# Altium PCB ZYNQ_Motherboard_final.PcbDoc (part 2 of 2)
Units mm, origin at the board's own origin, x right, y up, seen from the top; angles counter-clockwise.
Board outline 100.01 x 120 mm, 4 copper layers (Top Layer, GND, Signal03, Bottom Layer), stack 0.778 mm thick; 115 components, 152 nets, 669 pads, 267 vias.
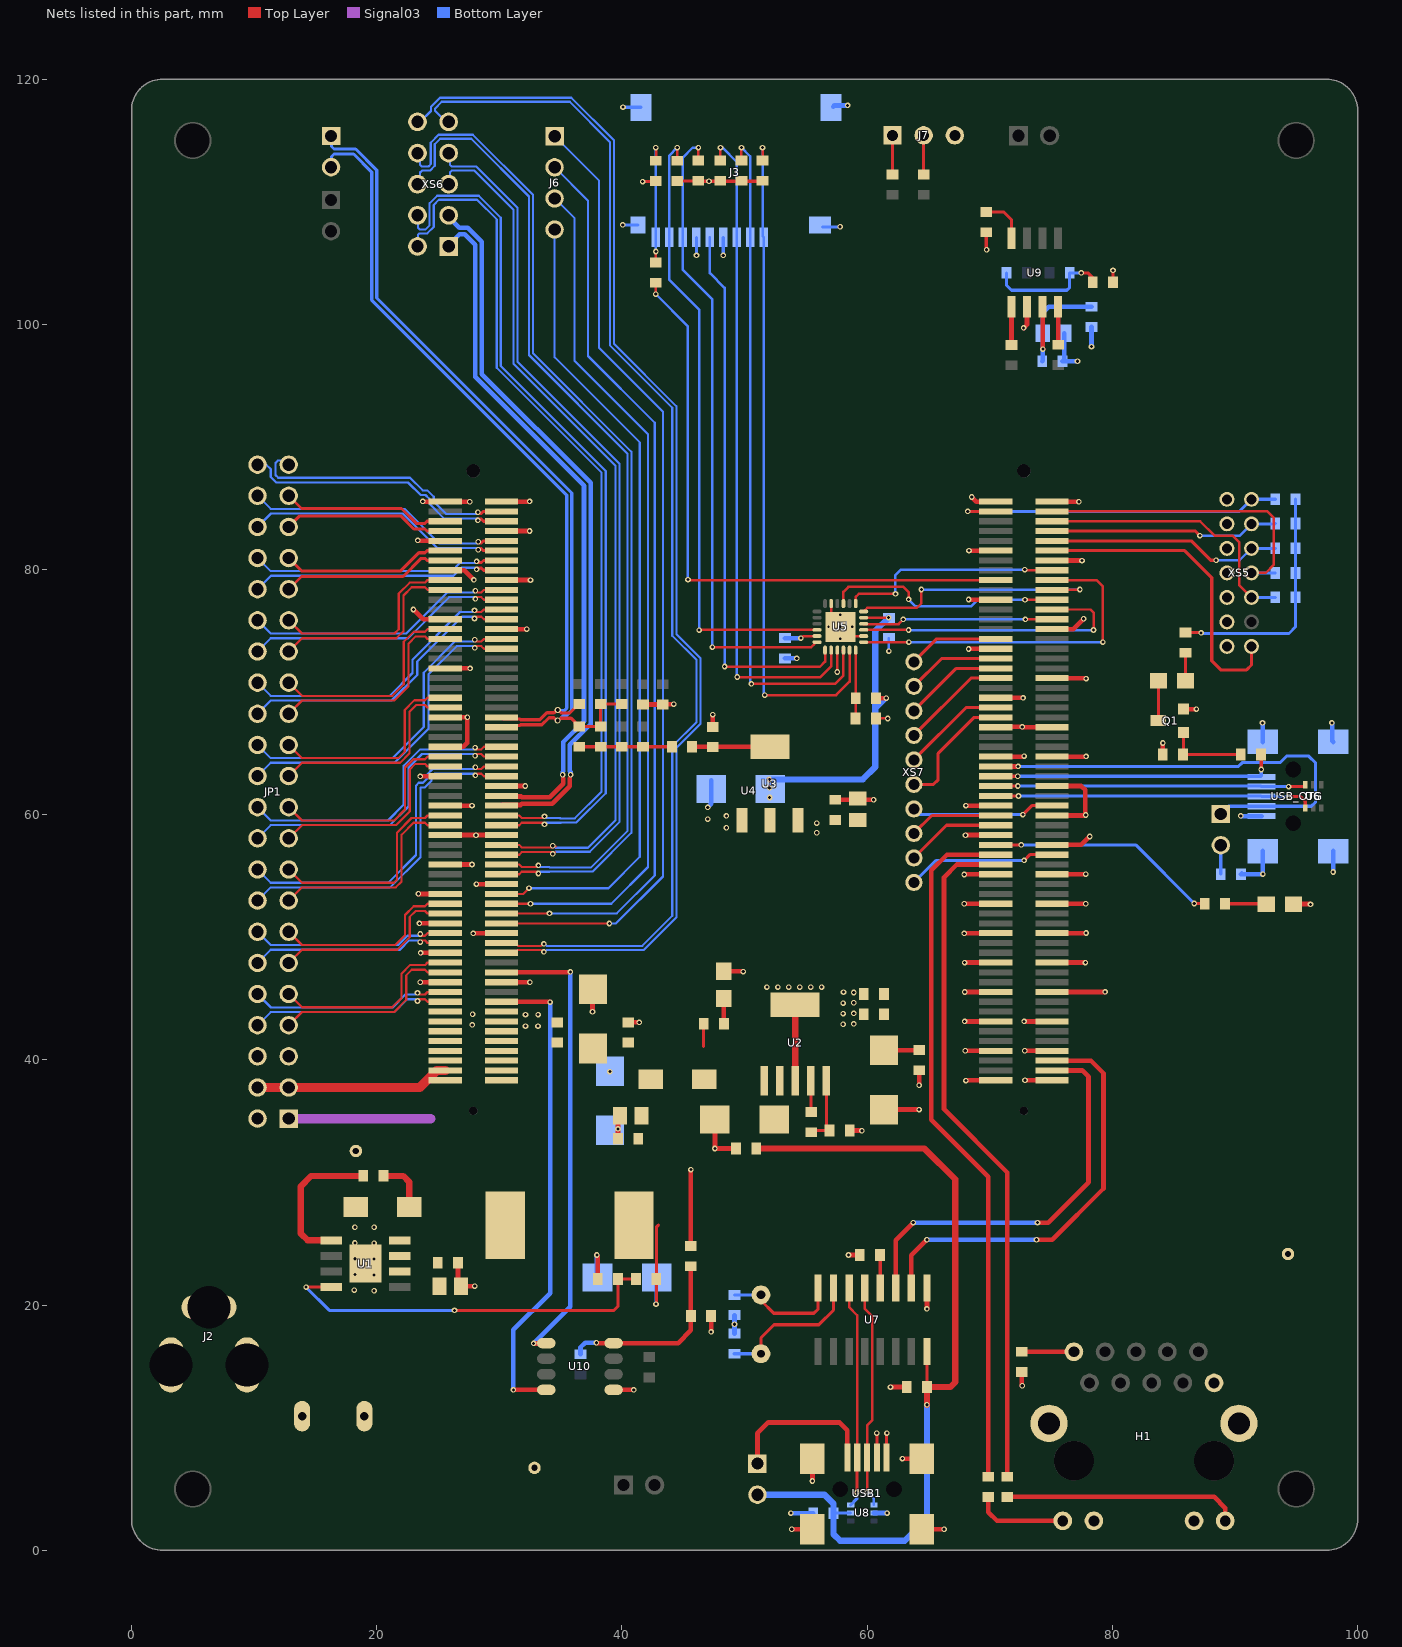
[diagram p4: the nets of this part, all layers, seen from the top]

## Via types
v1: diameter 0.457, hole 0.254, Top Layer to Bottom Layer, tented both sides, 260 vias
v2: diameter 0.4, hole 0.2, Top Layer to Bottom Layer, tented top, 4 vias
v3: diameter 0.5, hole 0.3, Top Layer to Bottom Layer, tented both sides, 2 vias
v4: diameter 0.4, hole 0.2, Top Layer to Bottom Layer, 1 vias

## Nets (pads, with @x,y where several pads share a name; then routed paths per layer and width w, separated by ;. In a path a pad name is that pad's centre, name@x,y a point inside that pad or via, vN(x,y) a via of type N, cw(c..) or ccw(c..) an arc to the next point about the centre after c; other vN are vias at no path point) (continued)
GND: C2.2 C3.2 C4.2 C5.2 C6.2 C7.1 C8.1 C9.2 C10.2 C11.1 C12.1 C13.2 C14.2 C15.2 C16.2 C17.2 C18.2 C19.1 C20.1 C25.1 C26.2 C27.2 C28.1 C29.1 C30.1 C31.2 C32.2 C33.2 C34.2 D2.1 DS1.2 DS3.2 H1.10 H1.12 H1.13 H1.15 H1.16 J2.2 J2.3 J3.6 J3.10 J3.11 J3.12 J3.13 J7.3 JP1.2 JP1.5 JP1.6 L3.1 L5.1 pad.2 Q1.2 R2.2 R5.1 R6.2 R8.1 R15.1 R30.1 R34.2 U1.6 U1.9 U2.3 U2.6 U3.1 U4.A11 U4.A12 U4.A13 U4.A14 U4.A15 U4.A16 U4.A21 U4.A22 U4.A27 U4.A32 U4.A33 U4.A39 U4.A42 U4.A45 U4.A51 U4.A52 U4.A57 U4.A62 U4.A63 U4.A69 U4.A75 U4.A85 U4.A94 U4.A95 U4.A104 U4.A105 U4.A111 U4.A114 U4.A119 U4.A120 U4.B1 U4.B2 U4.B7 U4.B8 U4.B13 U4.B14 U4.B19 U4.B20 U4.B25 U4.B26 U4.B31 U4.B32 U4.B37 U4.B38 U4.B43 U4.B44 U4.B50 U4.B51 U4.B56 U4.B57 U4.B62 U4.B67 U4.B68 U4.B73 U4.B74 U4.B79 U4.B84 U4.B89 U4.B94 U4.B99 U4.B108 U4.B109 U4.B119 U4.B120 U5.2 U5.11 U5.25 U7.1 U8.2 U9.2 U10.5 USB1.4 USB1.5 USB1.6 USB1.7 USB1.8 USB1.9 USB_OTG.5 USB_OTG.6 USB_OTG.7 USB_OTG.8 USB_OTG.9 XS5.1 XS5.3 XS5.5 XS5.7 XS5.9 XS5.11 XS5.13 | length 244.4
  Top Layer w0.203: U5.11@57.074,77.226 57.074,76.076 v2(57.824,75.326) 58.574,74.576 U5.2@59.724,74.576 ; R8.1@60.72,67.854 v1(61.685,67.854)
  Top Layer w0.254: v1(41.695,111.643) 42.838,111.643 R15.1@42.788,111.694 ; v1(60.796,9.565) 60.799,9.562 USB1.4@60.799,7.567 ; USB1.5@61.599,7.567 61.599,9.58 v1(61.614,9.565) ; R30.1@69.723,107.505 69.723,106.107 v1(69.749,106.082) ; C34.2@80.06,103.44 80.06,104.404 v1(80.061,104.405)
  Top Layer w0.381: v1(23.001,76.744) 23.804,75.941 U4.A95@25.592,75.941 ; v1(23.357,82.383) 23.398,82.341 U4.A111@25.592,82.341 ; v1(23.407,53.554) 23.42,53.541 U4.A39@25.592,53.541 ; v1(23.484,51.141) U4.A33@25.592,51.141 ; v1(23.56,63.13) 23.571,63.141 U4.A63@25.592,63.141 ; v1(23.56,46.34) U4.A21@25.592,46.341 ; v1(23.585,48.728) 23.598,48.741 U4.A27@25.592,48.741 ; v1(23.763,85.558) 23.78,85.541 U4.A119@25.592,85.541 27.59,85.541 v1(27.598,85.532) ; U4.A45@25.592,55.941 v1(27.776,55.941) ; U4.A51@25.592,58.341 28.094,58.341 v1(28.106,58.329) 28.118,58.341 U4.A52@30.192,58.341 ; U4.A57@25.592,60.741 v1(27.776,60.742) v1(27.776,60.742) ; U4.A69@25.592,65.541 27.063,65.541 27.381,65.858 27.381,67.941 U4.A75@25.592,67.941 ; U4.A85@25.592,71.941 27.621,71.941 v1(27.624,71.943) ; U4.A105@25.592,79.941 27.145,79.941 v1(27.929,79.157) ; C3.2@26.629,23.455 26.629,21.797 C2.2@26.883,21.544 v1@27.996,21.544 ; v1(27.878,50.328) 27.891,50.341 U4.A32@30.192,50.341 ; v1(28.132,54.341) U4.A42@30.192,54.341 ; U4.A22@30.192,46.341 v1(32.501,46.34) ; U4.A62@30.192,62.341 v1(32.12,62.342) v1(32.12,62.342) ; U4.A94@30.192,75.141 32.244,75.141 v1(32.247,75.144) ; U4.A104@30.192,79.141 32.542,79.141 v1(32.551,79.132) ; U4.A114@30.192,83.141 32.471,83.141 v1(32.475,83.145) ; U4.A120@30.192,85.541 32.458,85.541 v1(32.475,85.558) ; v1(37.606,43.927) 37.606,46.239 C15.2@37.657,46.289 ; v1(37.962,24.09) 37.911,24.09 38.038,23.963 R2.2@38.038,22.134 ; U10.5@39.335,13.092 v1(40.972,13.092) ; C14.2@39.69,33.564 v1(39.69,34.377) 39.69,35.278 C10.2@39.855,35.444 ; C18.2@40.527,43.064 v1(41.416,43.064) ; L5.1@41.721,68.997 L3.1@43.346,68.998 ; L3.1@43.346,68.998 43.36,69.012 44.223,69.012 v1(44.236,69.025) ; C33.2@47.282,19.111 v1(47.283,17.816) v1(47.283,17.816) ; v1(47.418,68.168) 47.423,68.163 47.423,67.169 C12.1@47.428,67.165 ; C6.2@47.594,35.153 47.594,32.783 v1(47.588,32.777) C5.2@49.315,32.777 ; DS1.2@48.299,47.229 49.874,47.229 v1(49.9,47.204) ; v1(53.862,1.716) 53.865,1.713 USB1.9@55.549,1.713 ; v1(55.538,5.653) 55.549,5.664 USB1.8@55.549,7.467 ; C7.1@57.418,61.226 v1(60.542,61.226) ; v1(58.485,24.087) C25.1@59.4,24.087 ; R34.2@58.586,34.25 59.552,34.25 v1(59.577,34.224) ; C4.2@61.38,35.952 v1(64.251,35.952) ; v1(61.914,13.317) C26.2@63.235,13.317 ; v1(62.879,7.482) 62.894,7.467 USB1.6@64.449,7.467 ; v1(64.251,37.933) C11.1@64.251,39.153 ; USB1.7@64.449,1.713 66.28,1.713 v1(66.283,1.716) ; v1(64.886,19.693) U7.1@64.886,21.404 ; v1(67.934,50.328) 67.947,50.341 U4.B31@70.499,50.341 ; v1(67.934,52.741) U4.B37@70.499,52.741 ; v1(67.934,55.129) 67.946,55.141 U4.B43@70.499,55.141 ; v1(67.959,43.14) v1(67.959,43.14) U4.B13@70.499,43.141 ; v1(67.959,47.94) U4.B25@70.499,47.941 ; v1(67.971,45.541) U4.B19@70.499,45.541 ; v1(68.01,40.752) 68.021,40.741 U4.B7@70.499,40.741 ; v1(68.035,58.329) 68.047,58.341 U4.B51@70.499,58.341 ; v1(68.061,38.314) 68.088,38.341 U4.B1@70.499,38.341 ; v1(68.061,60.742) v1(68.061,60.742) U4.B57@70.499,60.741 ; v1(68.289,73.518) 68.312,73.541 U4.B89@70.499,73.541 ; v1(68.289,77.557) 68.305,77.541 U4.B99@70.499,77.541 ; v1(68.315,81.545) 68.318,81.541 U4.B109@70.499,81.541 ; v1(68.543,85.913) 68.916,85.541 U4.B119@70.499,85.541 ; U4.B67@70.499,64.741 72.771,64.741 v1(72.81,64.781) ; U4.B73@70.499,67.141 70.526,67.168 v1(72.658,67.168) 72.685,67.141 U4.B74@75.099,67.141 ; U4.B79@70.499,69.541 72.724,69.541 v1(72.734,69.53) ; C27.2@72.633,14.544 72.633,13.451 v1(72.658,13.426) ; v1(72.771,99.706) 73.051,99.986 U9.2@73.051,101.434 ; v1(72.81,43.14) v1(72.81,43.14) U4.B14@75.099,43.141 ; v1(72.861,40.752) 72.872,40.741 U4.B8@75.099,40.741 ; v1(72.887,38.339) 72.888,38.341 U4.B2@75.099,38.341 ; U4.B20@75.099,45.541 79.403,45.541 v1(79.414,45.553) ; U4.B26@75.099,47.941 v1(77.814,47.94) ; U4.B32@75.099,50.341 77.853,50.341 v1(77.865,50.353) ; U4.B38@75.099,52.741 v1(77.84,52.741) ; U4.B44@75.099,55.141 77.827,55.141 v1(77.84,55.154) ; U4.B50@75.099,57.541 77.483,57.541 v1(78.17,58.227) ; U4.B56@75.099,59.941 77.801,59.941 77.801,62.026 77.485,62.341 U4.B62@75.099,62.341 ; U4.B68@75.099,64.741 77.851,64.741 v1(77.865,64.755) ; U4.B84@75.099,71.141 77.829,71.141 v1(77.865,71.105) ; U4.B94@75.099,75.141 76.821,75.141 v1(77.662,75.982) ; U4.B108@75.099,80.741 77.526,80.741 v1(77.535,80.732) ; U4.B120@75.099,85.541 77.272,85.541 v1(77.281,85.532) ; R6.2@84.127,64.908 84.127,65.823 84.126,65.824 v1(84.126,65.847) ; Q1.2@85.802,68.616 v1(86.869,68.616) ; DS3.2@94.779,52.714 96.151,52.714 v1(96.175,52.69)
  Top Layer w0.508: U2.3@54.141,38.314 U2.6@54.141,44.514
  Bottom Layer w0.203: v1(61.787,73.34) C19.1@61.787,74.408
  Bottom Layer w0.254: v1(40.07,108.113) 40.078,108.105 J3.10@41.32,108.105 ; v1(40.095,117.714) 40.104,117.705 J3.11@41.574,117.705 ; J3.6@46.074,107.097 46.074,105.639 v1(46.09,105.624) ; J3.12@56.388,107.95 v1@57.802,107.95 ; v1@69.741,106.09 v1(69.749,106.082)
  Bottom Layer w0.381: v1(37.962,24.09) 37.962,22.185 C13.2@38.012,22.236 ; v1(47.004,60.606) 47.283,60.885 C9.2@47.283,62.815 ; C28.1@49.188,17.686 v1(49.188,18.436) C29.1@49.188,19.186 ; C20.1@53.303,72.756 v1(54.268,72.756) ; v1(53.786,3.037) C30.1@55.615,3.037 ; J3.13@57.24,117.756 57.341,117.856 v1(58.42,117.856) ; U8.2@60.563,3.047 61.624,3.047 v1(61.634,3.037) ; C31.2@76.085,99.275 76.085,97.128 C32.2@75.945,96.989 v1(77.165,96.989) ; v1(90.478,59.904) 90.494,59.888 USB_OTG.5@92.171,59.888 ; R5.1@90.554,55.205 R5.1@90.503,55.154 v1(92.282,55.154) 92.271,55.165 USB_OTG.6@92.271,57.038 ; v1(92.256,67.498) 92.271,67.484 USB_OTG.8@92.271,65.938 ; v1(97.921,67.498) 97.946,67.473 97.946,66.017 USB_OTG.9@98.025,65.938 ; v1@98.025,55.335 USB_OTG.7@98.025,57.038
  other v1: 19.798,21.169 18.172,21.22 28.002,21.55 19.798,22.464 18.223,22.502 19.798,23.76 18.248,23.785 19.798,25.055 18.223,25.068 18.223,26.35 19.798,26.35 32.145,42.759 33.161,42.759 27.802,42.86 32.145,43.699 33.174,43.699 27.827,43.724 51.83,45.934 52.724,45.934 53.618,45.934 54.512,45.934 55.406,45.934 56.3,45.934 98.022,55.332 48.528,58.94 47.004,59.64 48.528,59.906 77.84,59.98 27.395,67.956 57.81,107.958
  other v2: 57.824,74.356 56.854,75.326 58.794,75.326
  other v4: 57.824,76.296
I2C0_CMD_1V8: U4.B96 U5.4 | length 15.6
  Top Layer w0.203: U5.4@59.724,75.576 59.751,75.55 62.569,75.55 v1(62.955,75.936) ; v1(72.912,75.931) 75.089,75.931 U4.B96@75.099,75.941
  Bottom Layer w0.203: v1(62.955,75.936) 62.96,75.931 v1(72.912,75.931)
IO13_L11_N: JP1.41 U4.A115 | length 13.8
  Top Layer w0.254: JP1.41@12.826,86.015 13.867,84.974 22.026,84.974 23.23,83.77 23.943,83.77 24.115,83.941 U4.A115@25.592,83.941
IO13_L11_P: JP1.39 U4.A113 | length 13.7
  Top Layer w0.254: JP1.39@12.826,83.475 13.733,84.382 21.97,84.382 23.04,83.312 23.943,83.312 24.115,83.141 U4.A113@25.592,83.141
IO13_L12_N: JP1.34 U4.A102 | length 21.9
  Top Layer w0.178: v1(28.056,78.271) 28.195,78.131 28.543,78.131 28.753,78.341 U4.A102@30.192,78.341
  Bottom Layer w0.178: JP1.34@10.286,75.855 11.365,74.775 22.408,74.775 25.764,78.131 27.916,78.131 v1(28.056,78.271)
IO13_L12_P: JP1.32 U4.A100 | length 21.9
  Top Layer w0.178: v1(28.056,77.611) 28.195,77.75 28.543,77.75 28.753,77.541 U4.A100@30.192,77.541
  Bottom Layer w0.178: JP1.32@10.286,73.315 11.365,74.394 22.566,74.394 25.119,76.947 25.922,77.75 27.916,77.75 v1(28.056,77.611)
IO13_L13_N: JP1.37 U4.A109 | length 13.9
  Top Layer w0.254: JP1.37@12.826,80.935 13.867,79.894 21.971,79.894 23.447,81.37 23.943,81.37 24.115,81.541 U4.A109@25.592,81.541
IO13_L13_P: JP1.35 U4.A107 | length 13.9
  Top Layer w0.254: JP1.35@12.826,78.395 13.867,79.436 22.16,79.436 23.636,80.912 23.943,80.912 24.115,80.741 U4.A107@25.592,80.741
IO13_L14_N: JP1.27 U4.A91 | length 17.5
  Top Layer w0.178: JP1.27@12.826,68.235 13.905,69.314 21.432,69.314 22.595,70.477 22.595,73.95 23.195,74.55 23.943,74.55 24.153,74.341 U4.A91@25.592,74.341
IO13_L14_P: JP1.29 U4.A93 | length 17.5
  Top Layer w0.178: JP1.29@12.826,70.775 13.905,69.695 21.274,69.695 22.214,70.635 22.214,74.108 23.037,74.931 23.943,74.931 24.153,75.141 U4.A93@25.592,75.141
IO13_L15_N: JP1.33 U4.A103 | length 16.7
  Top Layer w0.178: JP1.33@12.826,75.855 13.905,74.775 21.452,74.775 21.807,75.131 21.807,78.045 22.694,78.931 23.943,78.931 24.153,79.141 U4.A103@25.592,79.141
IO13_L15_P: JP1.31 U4.A101 | length 16.7
  Top Layer w0.178: JP1.31@12.826,73.315 13.905,74.394 21.609,74.394 22.188,74.973 22.188,77.887 22.852,78.55 23.943,78.55 24.153,78.341 U4.A101@25.592,78.341
IO13_L17_N: JP1.36 U4.A106 | length 20.8
  Top Layer w0.254: v1(28.157,80.011) 28.259,80.112 28.543,80.112 28.715,79.941 U4.A106@30.192,79.941
  Bottom Layer w0.178: JP1.36@10.286,78.395 11.378,79.487 26.275,79.487 26.938,80.15 28.018,80.15 v1(28.157,80.011)
IO13_L17_P: JP1.38 U4.A108 | length 20.8
  Top Layer w0.254: v1(28.157,80.671) 28.259,80.57 28.543,80.57 28.715,80.741 U4.A108@30.192,80.741
  Bottom Layer w0.178: JP1.38@10.286,80.935 11.353,79.868 26.117,79.868 26.78,80.531 28.018,80.531 v1(28.157,80.671)
IO13_L18_N: JP1.25 U4.A79 | length 17.2
  Top Layer w0.178: JP1.25@12.826,65.695 13.905,64.615 21.756,64.615 22.29,65.149 22.29,68.545 23.076,69.331 23.943,69.331 24.153,69.541 U4.A79@25.592,69.541
IO13_L18_P: JP1.23 U4.A77 | length 17.2
  Top Layer w0.178: JP1.23@12.826,63.155 13.905,64.234 21.914,64.234 22.671,64.991 22.671,65.149 22.671,65.626 22.671,68.387 23.234,68.95 23.943,68.95 24.153,68.741 U4.A77@25.592,68.741
IO13_L19_N: JP1.40 U4.A110 | length 21.7
  Top Layer w0.254: v1(28.284,81.611) 28.284,81.636 28.36,81.712 28.543,81.712 28.715,81.541 U4.A110@30.192,81.541
  Bottom Layer w0.178: JP1.40@10.286,83.475 11.378,84.567 22.135,84.567 24.951,81.75 28.145,81.75 v1(28.284,81.611)
IO13_L19_P: JP1.42 U4.A112 | length 21.7
  Top Layer w0.254: v1(28.284,82.271) 28.284,82.246 28.36,82.17 28.543,82.17 28.715,82.341 U4.A112@30.192,82.341
  Bottom Layer w0.178: JP1.42@10.286,86.015 11.353,84.948 22.292,84.948 25.109,82.131 28.145,82.131 v1(28.284,82.271)
IO13_L22_N: JP1.44 U4.A116 | length 22.5
  Top Layer w0.254: v1@28.259,84.112 28.543,84.112 28.715,83.941 U4.A116@30.192,83.941
  Bottom Layer w0.178: JP1.44@10.286,88.555 11.004,88.555 11.365,88.194 11.365,87.546 11.805,87.107 22.564,87.107 23.592,86.078 23.979,86.078 24.284,85.773 24.284,85.387 25.52,84.15 28.233,84.15 28.259,84.125 v1(28.259,84.011)
IO13_L22_P: JP1.43 U4.A118 | length 22.5
  Top Layer w0.254: v1@28.259,84.57 28.543,84.57 28.715,84.741 U4.A118@30.192,84.741
  Bottom Layer w0.178: JP1.43@12.826,88.555 12.496,88.885 11.937,88.885 11.746,88.695 11.746,87.704 11.962,87.488 22.722,87.488 23.75,86.459 24.136,86.459 24.665,85.931 24.665,85.545 25.678,84.531 28.233,84.531 28.259,84.557 v1(28.259,84.671)
IO34_0: J6.3 U4.A38 | length 70.9
  Top Layer w0.178: U4.A38@30.192,52.741 v1(32.551,52.741)
  Bottom Layer w0.178: v1(32.551,52.741) 39.129,52.741 42.127,55.739 42.127,91.024 36.146,97.006 36.146,108.644 J6.3@34.517,110.273
IO34_25: J6.4 U4.A40 | length 66.6
  Top Layer w0.178: U4.A40@30.192,53.541 31.954,53.541 v1(32.424,54.011)
  Bottom Layer w0.178: v1(32.424,54.011) 38.908,54.011 41.465,56.568 41.465,90.37 34.517,97.318 J6.4@34.517,107.733
IO34_L1_N: JP1.28 U4.A96 | length 24
  Top Layer w0.178: v1(27.979,76.011) 28.119,76.15 28.543,76.15 28.753,75.941 U4.A96@30.192,75.941
  Bottom Layer w0.178: JP1.28@10.286,68.235 11.365,69.314 21.216,69.314 23.306,71.405 23.306,72.493 26.963,76.15 27.84,76.15 v1(27.979,76.011)
IO34_L1_P: JP1.30 U4.A98 | length 24
  Top Layer w0.178: v1(27.979,76.671) 28.119,76.531 28.543,76.531 28.753,76.741 U4.A98@30.192,76.741
  Bottom Layer w0.178: JP1.30@10.286,70.775 11.365,69.695 21.058,69.695 22.925,71.562 22.925,72.651 26.806,76.531 27.84,76.531 v1(27.979,76.671)
IO34_L2_N: JP1.26 U4.A92 | length 27.1
  Top Layer w0.178: v1(28.005,74.271) 28.145,74.131 28.543,74.131 28.753,74.341 U4.A92@30.192,74.341
  Bottom Layer w0.178: JP1.26@10.286,65.695 11.365,64.615 21.299,64.615 23.839,67.155 23.839,71.593 26.377,74.131 27.865,74.131 v1(28.005,74.271)
IO34_L2_P: JP1.24 U4.A90 | length 27.1
  Top Layer w0.178: v1(28.005,73.611) 28.145,73.75 28.543,73.75 28.753,73.541 U4.A90@30.192,73.541
  Bottom Layer w0.178: JP1.24@10.286,63.155 11.365,64.234 21.457,64.234 24.22,66.998 24.22,71.435 26.535,73.75 27.865,73.75 v1(28.005,73.611)
IO34_L5_N: U4.A48 XS6.7 | length 72.6
  Top Layer w0.178: U4.A48@30.192,56.741 31.631,56.741 31.84,56.95 v1@34.363,56.95 ; v1(34.363,56.811) 34.418,56.811 34.558,56.95
  Bottom Layer w0.178: XS6.7@25.873,113.973 25.975,113.872 25.975,113.014 26.121,112.868 28.121,112.868 31.484,109.506 31.484,96.941 39.82,88.605 39.82,59.416 37.38,56.976 34.604,56.976 34.439,56.811 v1(34.363,56.811)
IO34_L5_P: U4.A50 XS6.5 | length 71.5
  Top Layer w0.178: U4.A50@30.192,57.541 31.631,57.541 31.84,57.331 v1@34.363,57.331 ; v1(34.363,57.471) 34.416,57.418 34.63,57.418
  Bottom Layer w0.178: XS6.5@25.873,111.433 25.975,111.535 25.975,112.392 26.121,112.538 27.985,112.538 31.154,109.369 31.154,96.804 39.49,88.468 39.49,59.553 37.243,57.306 34.604,57.306 34.439,57.471 v1(34.363,57.471)
IO34_L6_N: U4.A54 XS6.4 | length 70.9
  Top Layer w0.178: U4.A54@30.192,59.141 31.631,59.141 31.84,59.35 33.555,59.35 v1(33.694,59.211)
  Bottom Layer w0.178: XS6.4@23.333,108.893 23.378,108.848 23.378,107.868 23.497,107.75 23.993,107.75 24.321,108.077 24.321,109.872 24.939,110.49 28.329,110.49 30.122,108.697 30.122,96.601 38.683,88.04 38.683,61.753 36.306,59.376 35.041,59.376 35.015,59.35 33.834,59.35 v1(33.694,59.211)
IO34_L6_P: U4.A56 XS6.2 | length 69.8
  Top Layer w0.178: U4.A56@30.192,59.941 31.631,59.941 31.84,59.731 33.555,59.731 v1(33.694,59.871)
  Bottom Layer w0.178: XS6.2@23.333,106.353 23.378,106.398 23.378,107.312 23.485,107.419 24.13,107.419 24.651,107.941 24.651,109.735 25.076,110.16 28.192,110.16 29.792,108.56 29.792,96.465 38.353,87.903 38.353,61.89 36.169,59.706 34.978,59.706 34.952,59.731 33.834,59.731 v1(33.694,59.871)
IO34_L7_N: JP1.15 U4.A53 | length 17.7
  Top Layer w0.178: JP1.15@12.826,52.995 13.905,54.074 21.559,54.074 22.036,54.552 22.036,58.38 23.006,59.35 23.943,59.35 24.153,59.141 U4.A53@25.592,59.141
IO34_L7_P: JP1.17 U4.A55 | length 17.7
  Top Layer w0.178: JP1.17@12.826,55.535 13.905,54.455 21.401,54.455 21.655,54.709 21.655,58.538 22.849,59.731 23.943,59.731 24.153,59.941 U4.A55@25.592,59.941
IO34_L8_N: U4.A60 XS6.1 | length 56.7
  Top Layer w0.381: U4.A60@30.192,61.541 30.251,61.481 31.792,61.481 31.857,61.417 34.108,61.417 35.23,62.538 35.23,62.98
  Bottom Layer w0.381: XS6.1@25.873,106.353 26.445,106.925 26.445,107.044 26.757,107.357 27.199,107.357 28.051,106.504 28.051,95.712 36.919,86.843 36.919,67.623 35.23,65.934 35.23,63.546 35.181,63.497 35.181,63.278 v1(35.166,63.263)
IO34_L8_P: U4.A58 XS6.3 | length 58.4
  Top Layer w0.381: U4.A58@30.192,60.741 30.251,60.801 31.766,60.801 31.849,60.883 34.329,60.883 35.763,62.317 35.763,62.98
  Bottom Layer w0.381: XS6.3@25.873,108.893 25.873,108.762 26.745,107.89 27.42,107.89 28.585,106.725 28.585,95.932 37.453,87.064 37.453,67.403 35.763,65.713 35.763,63.546 35.812,63.497 35.812,63.278 v1(35.827,63.263)
IO34_L9_N: JP1.18 U4.A66 | length 27.9
  Top Layer w0.178: v1(28.056,63.871) 28.195,63.731 28.543,63.731 28.753,63.941 U4.A66@30.192,63.941
  Bottom Layer w0.178: JP1.18@10.286,55.535 11.365,54.455 20.944,54.455 23.204,56.716 23.204,62.373 23.44,62.609 23.775,62.609 24.081,62.914 24.081,63.249 24.563,63.731 27.916,63.731 v1(28.056,63.871)
IO34_L9_P: JP1.16 U4.A64 | length 27.9
  Top Layer w0.178: v1(28.056,63.211) 28.195,63.35 28.543,63.35 28.753,63.141 U4.A64@30.192,63.141
  Bottom Layer w0.178: JP1.16@10.286,52.995 11.365,54.074 21.101,54.074 23.585,56.558 23.585,62.215 23.598,62.228 23.933,62.228 24.462,62.756 24.462,63.091 24.72,63.35 27.916,63.35 v1(28.056,63.211)
IO34_L10_N: JP1.19 U4.A65 | length 17.4
  Top Layer w0.178: JP1.19@12.826,58.075 13.905,59.154 21.584,59.154 22.696,60.267 22.696,63.688 23.158,64.15 23.943,64.15 24.153,63.941 U4.A65@25.592,63.941
IO34_L10_P: JP1.21 U4.A67 | length 17.4
  Top Layer w0.178: JP1.21@12.826,60.615 13.905,59.535 21.426,59.535 22.315,60.424 22.315,63.846 23,64.531 23.943,64.531 24.153,64.741 U4.A67@25.592,64.741
IO34_L11_N: JP1.22 U4.A70 | length 24.8
  Top Layer w0.178: v1(28.03,65.471) 28.17,65.331 28.543,65.331 28.753,65.541 U4.A70@30.192,65.541
  Bottom Layer w0.178: JP1.22@10.286,60.615 11.365,59.535 20.918,59.535 22.214,60.831 22.214,63.999 23.546,65.331 27.891,65.331 v1(28.03,65.471)
IO34_L11_P: JP1.20 U4.A68 | length 24.8
  Top Layer w0.178: v1(28.03,64.811) 28.17,64.95 28.543,64.95 28.753,64.741 U4.A68@30.192,64.741
  Bottom Layer w0.178: JP1.20@10.286,58.075 11.365,59.154 21.076,59.154 22.595,60.673 22.595,63.841 23.704,64.95 27.891,64.95 v1(28.03,64.811)
IO34_L12_N: JP1.7 U4.A23 | length 15.9
  Top Layer w0.178: JP1.7@12.826,42.835 13.905,43.914 21.432,43.914 22.417,44.9 22.417,46.899 22.868,47.35 23.943,47.35 24.153,47.141 U4.A23@25.592,47.141
IO34_L12_P: JP1.9 U4.A25 | length 15.9
  Top Layer w0.178: JP1.9@12.826,45.375 13.905,44.295 21.274,44.295 22.036,45.057 22.036,47.057 22.71,47.731 23.943,47.731 24.153,47.941 U4.A25@25.592,47.941
IO34_L16_N: JP1.14 U4.A31 | length 16.3
  Top Layer w0.178: v1(23.56,50.271) 23.7,50.131 23.943,50.131 24.153,50.341 U4.A31@25.592,50.341
  Bottom Layer w0.178: JP1.14@10.286,50.455 11.378,49.363 21.744,49.363 22.513,50.131 23.42,50.131 v1(23.56,50.271)
IO34_L16_P: JP1.12 U4.A29 | length 16.3
  Top Layer w0.178: v1(23.56,49.611) 23.7,49.75 23.943,49.75 24.153,49.541 U4.A29@25.592,49.541
  Bottom Layer w0.178: JP1.12@10.286,47.915 11.353,48.982 21.902,48.982 22.671,49.75 23.42,49.75 v1(23.56,49.611)
IO34_L20_N: JP1.8 U4.A17 | length 16.4
  Top Layer w0.178: v1(23.331,44.811) 23.471,44.95 23.943,44.95 24.153,44.741 U4.A17@25.592,44.741
  Bottom Layer w0.178: JP1.8@10.286,42.835 11.353,43.902 21.444,43.902 22.493,44.95 23.192,44.95 v1(23.331,44.811)
IO34_L20_P: JP1.10 U4.A19 | length 16.4
  Top Layer w0.178: v1(23.331,45.471) 23.471,45.331 23.943,45.331 24.153,45.541 U4.A19@25.592,45.541
  Bottom Layer w0.178: JP1.10@10.286,45.375 11.378,44.283 21.286,44.283 22.335,45.331 23.192,45.331 v1(23.331,45.471)
IO34_L21_N: JP1.13 U4.A37 | length 15.6
  Top Layer w0.178: JP1.13@12.826,50.455 13.905,49.375 21.515,49.375 22.315,50.176 22.315,51.826 23.021,52.531 23.943,52.531 24.153,52.741 U4.A37@25.592,52.741
IO34_L21_P: JP1.11 U4.A35 | length 15.6
  Top Layer w0.178: JP1.11@12.826,47.915 13.905,48.994 21.673,48.994 22.696,50.018 22.696,51.668 23.179,52.15 23.943,52.15 24.153,51.941 U4.A35@25.592,51.941
IO34_L24_N: U4.A30 XS6.9 | length 99.6
  Top Layer w0.178: U4.A30@30.192,49.541 31.292,49.541 31.526,49.306 33.397,49.306 33.562,49.471 v1(33.637,49.471)
  Bottom Layer w0.178: XS6.9@25.873,116.513 25.659,116.513 24.768,117.404 24.768,117.61 25.31,118.152 35.744,118.152 39.023,114.873 39.023,98.285 44.118,93.19 44.118,74.606 46.089,72.635 46.089,67.548 44.118,65.577 44.118,51.755 41.669,49.306 33.878,49.306 33.713,49.471 v1(33.637,49.471)
IO34_L24_P: U4.A28 XS6.10 | length 101.2
  Top Layer w0.178: U4.A28@30.192,48.741 31.292,48.741 31.526,48.976 33.397,48.976 33.562,48.811 v1(33.637,48.811)
  Bottom Layer w0.178: XS6.10@23.333,116.513 23.547,116.513 24.438,117.404 24.438,117.747 25.173,118.482 35.881,118.482 39.353,115.01 39.353,114.736 39.353,98.422 44.448,93.327 44.448,74.743 46.419,72.772 46.419,67.411 44.448,65.44 44.448,51.618 41.806,48.976 33.878,48.976 33.713,48.811 v1(33.637,48.811)
IO34_LN19: J6.1 U4.A34 | length 78.8
  Top Layer w0.178: U4.A34@30.192,51.141 38.974,51.141 v1(38.985,51.13)
  Bottom Layer w0.178: J6.1@34.517,115.353 38.148,111.722 38.148,98.069 43.35,92.868 43.35,54.964 39.515,51.13 v1(38.985,51.13)
IO34_LP19: J6.2 U4.A36 | length 74.9
  Top Layer w0.178: U4.A36@30.192,51.941 34.088,51.941 v1(34.101,51.954)
  Bottom Layer w0.178: v1(34.101,51.954) 39.596,51.954 42.687,55.045 42.687,91.969 37.244,97.412 37.244,110.086 J6.2@34.517,112.813
IO35_L21_N: U4.A44 XS6.8 | length 81.9
  Top Layer w0.178: U4.A44@30.192,55.141 31.631,55.141 31.84,55.35 33.047,55.35 v1(33.186,55.211)
  Bottom Layer w0.178: XS6.8@23.333,113.973 23.544,113.763 23.544,113.028 23.689,112.882 24.226,112.882 24.411,113.067 24.411,114.824 25.051,115.465 27.848,115.465 32.751,110.562 32.751,97.633 40.779,89.605 40.779,58.525 37.63,55.376 34.109,55.376 34.083,55.35 33.326,55.35 v1(33.186,55.211)
IO35_L21_P: U4.A46 XS6.6 | length 80.8
  Top Layer w0.178: U4.A46@30.192,55.941 31.631,55.941 31.84,55.731 33.047,55.731 v1(33.186,55.871)
  Bottom Layer w0.178: XS6.6@23.333,111.433 23.544,111.644 23.544,112.381 23.714,112.552 24.363,112.552 24.741,112.93 24.741,114.688 25.188,115.134 27.711,115.134 32.42,110.425 32.42,97.496 40.449,89.468 40.449,58.661 37.493,55.706 34.109,55.706 34.083,55.731 33.326,55.731 v1(33.186,55.871)
IO35_LN2: U4.B83 XS7.4 | length 8.6
  Top Layer w0.254: XS7.4@63.819,66.477 68.483,71.141 U4.B83@70.499,71.141
IO35_LN3: U4.B77 XS7.5 | length 8.4
  Top Layer w0.254: XS7.5@63.819,64.477 68.083,68.741 U4.B77@70.499,68.741
IO35_LN5: U4.B48 XS7.10 | length 12.2
  Top Layer w0.254: v1(72.81,56.272) 73.28,56.741 U4.B48@75.099,56.741
  Bottom Layer w0.254: XS7.10@63.819,54.477 65.614,56.272 v1(72.81,56.272)
IO35_LN16: U4.B55 XS7.8 | length 7.3
  Top Layer w0.254: XS7.8@63.819,58.477 65.283,59.941 U4.B55@70.499,59.941
IO35_LN19: U4.B87 XS7.2 | length 7.6
  Top Layer w0.254: XS7.2@63.819,70.477 66.083,72.741 U4.B87@70.499,72.741
IO35_LN20: U4.B91 XS7.1 | length 7.5
  Top Layer w0.254: XS7.1@63.819,72.477 65.683,74.341 U4.B91@70.499,74.341
IO35_LN22: U4.B58 XS7.7 | length 11.8
  Top Layer w0.254: v1(72.709,60.005) 73.444,60.741 U4.B58@75.099,60.741
  Bottom Layer w0.254: XS7.7@63.819,60.477 64.29,60.005 v1(72.709,60.005)
IO35_LP3: U4.B75 XS7.6 | length 10.2
  Top Layer w0.254: XS7.6@63.819,62.477 65.419,62.477 65.8,62.858 65.8,65.009 68.732,67.941 U4.B75@70.499,67.941
IO35_LP16: U4.B53 XS7.9 | length 7.8
  Top Layer w0.254: XS7.9@63.819,56.477 66.483,59.141 U4.B53@70.499,59.141
IO35_LP19: U4.B85 XS7.3 | length 8.1
  Top Layer w0.254: XS7.3@63.819,68.477 67.283,71.941 U4.B85@70.499,71.941
JTAG_VREF: R20.1 U4.B117 XS5.2 | length 27.8
  Top Layer w0.254: v1(68.213,84.745) 68.217,84.741 U4.B117@70.499,84.741
  Bottom Layer w0.254: v1(68.213,84.745) 90.375,84.745 XS5.2@91.358,85.728 91.366,85.736 R20.1@93.296,85.736
NetC1_1: C1.1 U1.1 | length 12
  Top Layer w0.508: U1.1@16.293,25.284 14.362,25.284 13.803,25.842 13.803,29.678 14.667,30.541 C1.1@18.91,30.541
NetC1_2: C1.2 D2.2 L1.1 U1.8 | length 4.3
  Top Layer w0.508: C1.2@20.56,30.541 22.16,30.541 22.658,30.043 D2.2@22.658,28.001
NetC4_1: C4.1 C11.2 L8.1 L9.1 R33.1 U2.4 | length 5.5
  Top Layer w0.254: R33.1@55.437,35.747 U2.4@55.437,38.288
  Top Layer w0.381: U2.4@55.411,38.314 U2.4@55.437,38.288 ; C4.1@61.38,40.778 64.225,40.778 C11.2@64.251,40.803
NetC10_1: C10.1 C13.1 C14.1 D1.1 L1.2 R1.1 | length 8.7
  Top Layer w0.254: v1(42.788,20.077) 42.812,20.101 R1.1@42.812,22.134 42.812,26.357 42.983,26.528
  Bottom Layer w0.254: v1(42.788,20.077) 42.788,22.185 C13.1@42.838,22.236
NetC21_1: C21.1 C22.1 C23.1 L2.2 R14.1 | length 7.5
  Top Layer w0.254: C21.1@36.539,65.543 R14.1@38.266,65.543 C22.1@39.994,65.543 C23.1@41.721,65.543 L2.2@44.084,65.543
NetC25_2: C25.2 U7.4 | length 2.7
  Top Layer w0.254: U7.4@61.076,21.404 C25.2@61.076,24.062
NetC27_1: C27.1 H1.1 | length 4.2
  Top Layer w0.381: C27.1@72.633,16.194 H1.1@76.874,16.194
NetC28_2: C28.2 U7.7 Y1.1 | length 12.1
  Top Layer w0.254: Y1.1@51.347,16.035 51.347,17.331 52.414,18.397 56.072,18.397 57.266,19.591 U7.7@57.266,21.404
  Bottom Layer w0.254: C28.2@49.163,16.035 Y1.1@51.347,16.035
NetC29_2: C29.2 U7.8 Y1.2 | length 9.6
  Top Layer w0.254: Y1.2@51.347,20.835 51.347,20.379 52.389,19.337 55.665,19.337 55.996,19.667 U7.8@55.996,21.404
  Bottom Layer w0.254: C29.2@49.188,20.836 Y1.2@51.347,20.835
NetC31_1: C31.1 C32.1 L7.2 U9.3 | length 11.6
  Top Layer w0.381: U9.3@74.321,101.434 74.321,98.005 v1(74.346,97.979)
  Bottom Layer w0.381: C32.1@74.295,96.989 74.335,97.028 C31.1@74.335,99.275 74.335,100.94 74.828,101.433 L7.2@78.308,101.433
NetC33_1: C33.1 L6.1 R25.2 U10.8 | length 15.4
  Top Layer w0.381: v1(37.924,16.927) 37.949,16.902 U10.8@39.335,16.902 44.593,16.902 45.632,17.941 C33.1@45.632,19.111 L6.1@45.632,23.175
  Bottom Layer w0.381: R25.2@36.629,15.986 36.629,16.546 37.01,16.927 v1(37.924,16.927)
NetC34_1: C34.1 R27.2 R28.1 | length 10
  Top Layer w0.254: v1(77.47,104.202) 78.004,104.202 78.41,103.796 C34.1@78.41,103.44
  Bottom Layer w0.254: R27.2@71.374,104.202 71.374,103.186 71.781,102.78 76.302,102.78 76.529,103.007 R28.1@76.529,104.202 v1(77.47,104.202)
NetDS1_1: DS1.1 R32.2 | length 2.1
  Top Layer w0.381: DS1.1@48.299,45.019 48.325,44.994 R32.2@48.325,42.962
NetDS2_1: DS2.1 R3.2 | length 2.3
  Top Layer w0.254: DS2.1@85.98,70.927 R3.2@85.98,73.213
NetDS2_2: DS2.2 Q1.3 | length 3.3
  Top Layer w0.254: Q1.3@83.77,67.676 DS2.2@83.77,70.927
NetDS3_1: DS3.1 R19.2 | length 3.4
  Top Layer w0.254: R19.2@89.19,52.741 92.542,52.741 DS3.1@92.569,52.714
NetH1_11: H1.11 R17.2 | length 7.6
  Top Layer w0.381: R17.2@69.889,4.359 69.889,3.113 70.598,2.404 H1.11@75.964,2.404
NetH1_14: H1.14 R18.2 | length 19.2
  Top Layer w0.381: R18.2@71.439,4.359 88.303,4.359 89.214,3.448 H1.14@89.214,2.404
NetJ1_1: J1.1 J2.1
NetJ7_1: J7.1 R37.2 | length 3.2
  Top Layer w0.254: R37.2@62.078,112.217 J7.1@62.078,115.418
NetJ7_2: J7.2 R36.2 | length 3.2
  Top Layer w0.254: R36.2@64.618,112.217 J7.2@64.618,115.418
NetQ1_1: Q1.1 R4.2 R6.1 | length 6.5
  Top Layer w0.254: Q1.1@85.802,66.711 85.802,64.933 85.827,64.908 R4.2@90.478,64.908
NetR1_2: R1.2 R2.1 U1.4 | length 32.1
  Top Layer w0.254: v1(14.242,21.47) 14.246,21.474 U1.4@16.293,21.474 ; v1(26.351,19.569) 39.359,19.569 39.688,19.898 R2.1@39.688,22.134 R1.2@41.162,22.134
  Bottom Layer w0.254: v1(14.242,21.47) 16.144,19.569 v1(26.351,19.569)
NetR5_2: R5.2 XS1.2 | length 2.4
  Bottom Layer w0.254: R5.2@88.853,55.154 XS1.2@88.853,57.516
NetR7_2: R7.2 R8.2 U5.24 | length 5.6
  Top Layer w0.203: R8.2@59.07,67.854 59.074,67.858 R7.2@59.074,69.505 U5.24@59.074,73.426
NetR29_2: R29.2 U9.1 | length 3.1
  Top Layer w0.381: R29.2@71.781,98.309 U9.1@71.781,101.434
NetR30_2: R30.2 U9.8 | length 3.8
  Top Layer w0.254: R30.2@69.723,109.155 71.171,109.155 71.781,108.546 U9.8@71.781,107.022
NetR31_2: R31.2 U9.4 | length 3.1
  Top Layer w0.381: R31.2@75.591,98.334 U9.4@75.591,101.434
NetR33_2: R33.2 R34.1 U2.5 | length 5.7
  Top Layer w0.254: R33.2@55.437,34.097 55.589,34.25 R34.1@56.936,34.25 56.681,34.505 U2.5@56.681,38.314
NetR35_2: R35.2 U4.B103 | length 50.4
  Top Layer w0.203: v1(42.762,102.469) 42.774,102.481 R35.2@42.774,103.397 ; v1(45.395,79.179) 45.432,79.141 U4.B103@70.499,79.141
  Bottom Layer w0.203: v1(42.762,102.469) 45.395,99.836 v1(45.395,79.179)
NetU7_5: U7.5 U8.1 USB1.3 | length 18.4
  Top Layer w0.203: U7.5@59.806,21.404 59.806,20.15 59.806,19.715 60.441,19.08 60.441,10.632 59.999,10.19 59.999,7.761 60.034,7.726 v1(60.034,4.764)
  Bottom Layer w0.203: v1(60.034,4.764) 60.563,4.236 U8.1@60.563,3.697
NetU7_6: U7.6 U8.6 USB1.2 | length 17.7
  Top Layer w0.203: U7.6@58.536,21.404 58.536,20.15 58.536,19.835 59.196,19.175 59.196,8.2 USB1.2@59.295,8.101
  Top Layer w0.254: v1(59.171,4.713) 59.171,7.539 USB1.2@59.199,7.567
  Bottom Layer w0.254: U8.6@58.663,3.697 59.171,4.205 v1(59.171,4.713)
NetUSB1_1: USB1.1 XS4.1 | length 12.6
  Top Layer w0.381: XS4.1@51.059,7.076 51.059,9.532 51.955,10.428 57.748,10.428 58.399,9.778 USB1.1@58.399,7.567
RGMII0_LED_10_100N: R19.1 U4.B49 | length 19
  Top Layer w0.254: U4.B49@70.499,57.541 v1(72.582,57.542) ; v1(86.69,52.756) 87.525,52.756 R19.1@87.54,52.741
  Bottom Layer w0.254: v1(72.582,57.542) 81.904,57.542 v1(86.69,52.756)
RGMII0_LED_1000N: R17.1 U4.B47 | length 57.2
  Top Layer w0.381: R17.1@69.889,6.009 69.889,30.465 65.241,35.113 65.241,55.459 66.523,56.741 U4.B47@70.499,56.741
RGMII0_LED_ACT: R18.1 U4.B45 | length 55.7
  Top Layer w0.381: U4.B45@70.499,55.941 67.324,55.941 66.283,54.9 66.283,35.977 71.439,30.82 R18.1@71.439,6.009
SD_CLK: J3.5 U5.19 | length 44.8
  Top Layer w0.203: v1(48.378,72.088) 48.395,72.07 56.148,72.07 56.574,72.497 U5.19@56.574,73.426
  Bottom Layer w0.203: J3.5@47.174,107.097 47.174,104.176 48.378,102.973 v1(48.378,72.088)
SD_CMD: J3.3 R11.2 U5.20 | length 54.2
  Top Layer w0.203: R11.2@48.04,113.371 48.04,114.407 v1(48.045,114.412) ; v1(49.417,71.232) 56.199,71.232 57.074,72.108 U5.20@57.074,73.426
  Bottom Layer w0.203: v1(48.045,114.412) 48.198,114.412 49.374,113.236 J3.3@49.374,107.097 49.374,100.85 49.374,71.275 v1(49.417,71.232)
SD_DATA0: J3.7 R12.2 U5.18 | length 52.4
  Top Layer w0.203: R12.2@46.242,113.371 v1(46.242,114.412) ; v1(47.383,73.67) 55.451,73.67 55.681,73.899 55.681,74.032 55.726,74.076 U5.18@55.924,74.076
  Bottom Layer w0.203: v1(46.242,114.412) 45.785,114.412 44.974,113.601 J3.7@44.974,107.097 44.974,104.444 47.383,102.035 v1(47.383,73.67)
SD_DATA1: J3.8 R13.2 U5.16 | length 51.3
  Top Layer w0.203: R13.2@44.515,113.344 v1(44.515,114.412) ; v1(46.299,75.062) 46.313,75.076 U5.16@55.924,75.076
  Bottom Layer w0.203: v1(44.515,114.412) 43.874,113.771 J3.8@43.874,107.097 43.874,103.622 46.299,101.197 v1(46.299,75.062)
SD_DATA2: J3.1 R9.2 U5.23 | length 55.7
  Top Layer w0.203: R9.2@51.474,113.371 v1(51.474,114.412) ; v1(51.652,69.759) 57.469,69.759 58.574,70.865 U5.23@58.574,73.426
  Bottom Layer w0.203: v1(51.474,114.412) 51.474,107.196 J3.1@51.574,107.097 51.574,100.85 51.574,69.837 v1(51.652,69.759)
SD_DATA3: J3.2 R10.2 U5.22 | length 55.2
  Top Layer w0.203: v1@49.757,114.402 R10.2@49.757,113.371 R10.2@49.874,113.487 ; v1(50.56,70.673) 57.393,70.673 58.074,71.355 U5.22@58.074,73.426 U5.22@58.029,73.381
  Bottom Layer w0.203: v1(49.757,114.412) 50.474,113.695 J3.2@50.474,107.097 50.474,100.85 50.474,70.759 v1(50.56,70.673)
SD_DET: J3.9 R15.2 R35.1 | length 10.4
  Top Layer w0.203: v1(42.762,114.412) 42.788,114.387 R15.2@42.788,113.344 ; R35.1@42.774,105.047 42.774,105.944 v1(42.773,105.945)
  Bottom Layer w0.203: v1(42.762,114.412) 42.774,114.4 J3.9@42.774,107.097 42.773,107.096 v1(42.773,105.945)
SDIO_CLK_1V8: U4.B100 U5.9 | length 19.4
  Top Layer w0.203: U5.9@58.074,77.226 58.074,78.18 58.477,78.583 62.967,78.583 63.387,78.163 v1(63.387,77.562) ; v1(72.887,77.531) 75.058,77.531 75.083,77.557 U4.B100@75.099,77.541 U4.B100@75.115,77.557
  Bottom Layer w0.203: v1(63.387,77.562) 63.925,77.023 68.51,77.023 69.018,77.531 v1(72.887,77.531)
SDIO_DATA0_1V8: U4.B102 U5.6 | length 21.3
  Top Layer w0.203: U5.6@59.724,76.576 60.019,76.871 64.047,76.871 64.428,77.252 v1(64.428,78.374) ; U4.B102@75.099,78.341 75.128,78.37 v1(77.357,78.37)
  Bottom Layer w0.203: v1(64.428,78.374) 64.433,78.37 v1(77.357,78.37)
SDIO_DATA1_1V8: U4.B106 U5.7 | length 18.4
  Top Layer w0.203: U5.7@59.074,77.226 59.074,77.77 59.323,78.019 v1(62.32,78.019) ; v1(72.861,79.995) 72.915,79.941 U4.B106@75.099,79.941
  Bottom Layer w0.203: v1(62.32,78.019) 62.32,79.543 62.773,79.995 v1(72.861,79.995)
SDIO_DATA2_1V8: U4.B104 U5.1 | length 28.4
  Top Layer w0.203: U5.1@59.724,74.076 v1(63.407,74.076) ; U4.B104@75.099,79.141 78.719,79.141 79.237,78.624 v1(79.237,74.077)
  Bottom Layer w0.203: v1(63.407,74.076) 63.412,74.072 79.231,74.072 v1(79.237,74.077)
SDIO_DATA3_1V8: U4.B98 U5.3 | length 23.7
  Top Layer w0.203: U5.3@59.724,75.076 63.383,75.076 v1(63.387,75.072) ; U4.B98@75.099,76.741 78.224,76.741 78.475,76.49 v1(78.475,75.068)
  Bottom Layer w0.203: v1(63.387,75.072) 63.392,75.068 v1(78.475,75.068)
USART1_RX: U4.B6 U7.2 | length 34.6
  Top Layer w0.381: U7.2@63.616,21.404 63.616,24.062 v1(64.886,25.332) ; v1(73.826,25.332) 75.105,25.332 79.287,29.514 79.287,38.923 78.27,39.941 U4.B6@75.099,39.941
  Bottom Layer w0.381: v1(64.886,25.332) v1(73.826,25.332)
USART1_TX: U4.B4 U7.3 | length 33.4
  Top Layer w0.381: U7.3@62.346,21.404 62.346,25.281 63.768,26.703 v1(63.768,26.729) ; v1(73.903,26.729) 74.785,26.729 78.068,30.011 78.068,38.619 77.546,39.141 U4.B4@75.099,39.141
  Bottom Layer w0.381: v1(63.768,26.729) v1(73.903,26.729)
USART3_RX: U4.A24 U10.1 | length 38.2
  Top Layer w0.381: U4.A24@30.192,47.141 35.765,47.141 v1(35.803,47.178) ; v1(32.803,16.876) U10.1@33.809,16.876
  Bottom Layer w0.381: v1(32.803,16.876) 35.803,19.876 v1(35.803,47.178)
USART3_TX: U4.A18 U10.4 | length 39.5
  Top Layer w0.381: U4.A18@30.192,44.741 34.125,44.741 v1(34.152,44.715) ; v1(31.152,13.092) U10.4@33.835,13.092
  Bottom Layer w0.381: v1(31.152,13.092) 31.152,17.979 34.152,20.979 v1(34.152,44.715)
USB_OTG_DM: U4.B61 U6.6 USB_OTG.2 | length 25.3
  Top Layer w0.254: U4.B61@70.499,62.341 v1(72.302,62.342) v1(72.302,62.342) ; v1(94.39,62.291) 95.594,62.291 U6.6@95.747,62.444
  Bottom Layer w0.254: v1(72.302,62.342) 92.117,62.342 USB_OTG.2@92.171,62.288 94.387,62.288 v1(94.39,62.291)
USB_OTG_DP: U4.B59 U6.1 USB_OTG.3 | length 26
  Top Layer w0.254: U4.B59@70.499,61.541 72.339,61.541 v1(72.351,61.529) ; v1(94.39,61.479) 95.381,61.479 95.747,61.113 U6.1@95.747,60.544
  Bottom Layer w0.254: v1(72.351,61.529) 92.13,61.529 USB_OTG.3@92.171,61.488 94.38,61.488 v1(94.39,61.479)
USB_OTG_ID: U4.B65 USB_OTG.4 XS1.1 | length 38
  Top Layer w0.381: U4.B65@70.499,63.941 72.276,63.941 72.277,63.942 v1(72.328,63.942)
  Bottom Layer w0.254: v1(72.328,63.942) 90.301,63.942 90.605,64.247 93.679,64.247 94.212,64.781 96.041,64.781 96.574,64.247 96.574,61.021 96.241,60.688 USB_OTG.4@92.171,60.688 89.485,60.688 XS1.1@88.853,60.056
USB_OTG_VBUS: R4.1 U4.B63 USB_OTG.1 | length 23.4
  Top Layer w0.254: U4.B63@70.499,63.141 v1(72.291,63.141) ; R4.1@92.128,64.908 92.18,64.856 92.155,64.83 v1(92.155,63.688)
  Bottom Layer w0.254: v1(72.291,63.141) 92.118,63.141 92.155,63.177 v1(92.155,63.688)
V0_N: L4.1 U4.A76 XS2.2 | length 63.5
  Top Layer w0.254: U4.A76@30.192,67.941 30.315,67.818 31.654,67.818 31.727,67.744 33.312,67.744 33.884,68.317 34.473,68.317 34.701,68.545 v3(34.767,68.545) 34.834,68.545 35.095,68.284 35.726,68.284 36.464,69.022 L4.1@36.539,69.022
  Bottom Layer w0.254: XS2.2@16.556,112.823 XS2.2@16.284,112.823 16.316,112.855 16.316,113.682 16.524,113.89 18.121,113.89 19.599,112.411 19.599,101.976 35.504,86.071 35.504,68.693 35.296,68.485 35.001,68.485 34.988,68.498 34.815,68.498 v3(34.767,68.545)
V0_P: C21.2 C24.1 R14.2 R16.1 U4.A74 XS2.1 | length 69.9
  Top Layer w0.254: U4.A74@30.192,67.141 30.315,67.264 31.654,67.264 31.727,67.338 33.48,67.338 34.053,67.91 34.466,67.91 34.694,67.682 v3(34.76,67.682) 34.827,67.682 35.012,67.868 35.864,67.868 36.191,67.541 36.191,67.466 36.464,67.193 C21.2@36.539,67.193 R14.2@38.266,67.193 C24.1@38.266,69.022 R16.1@39.994,69.022
  Bottom Layer w0.254: XS2.1@16.284,115.363 16.316,115.332 16.316,114.505 16.524,114.297 18.289,114.297 20.006,112.58 20.006,102.144 35.911,86.24 35.911,68.525 35.464,68.078 35.223,68.078 34.827,67.682 v3(34.76,67.682)
VCC5V: C5.1 C6.1 C15.1 C16.1 C17.1 C18.1 C26.1 C30.2 D1.2 JP1.3 JP1.4 R32.1 U2.1 U2.2 U4.A1 U4.A2 U4.A3 U4.A4 U4.A5 U4.A6 U4.A7 U4.A8 U4.A9 U4.A10 U7.16 U8.5 XS4.2 | length 86.8
  Top Layer w0.254: 46.673,41.109 R32.1@46.673,43.165 ; v1(64.886,11.87) v1(64.886,11.87) ; C26.1@64.885,13.317 U7.16@64.886,16.204 U7.16@64.886,16.204
  Top Layer w0.508: C5.1@50.965,32.777 64.682,32.777 67.197,30.262 67.197,13.724 66.791,13.317 C26.1@64.885,13.317 v1(64.886,11.87)
  Top Layer w0.762: JP1.4@10.286,37.755 JP1.3@12.826,37.755 23.509,37.755 24.895,39.141 U4.A3@25.592,39.141
  Bottom Layer w0.254: C30.2@57.265,3.037 57.275,3.047 U8.5@58.663,3.047
  Bottom Layer w0.508: XS4.2@51.059,4.536 56.529,4.536 57.265,3.8 C30.2@57.265,3.037 57.265,1.311 57.799,0.776 63.082,0.776 64.886,2.58 v1(64.886,11.87)
  other v1: 39.028,39.05
VCC12V: C2.1 C3.1 J1.3 U1.7
VDD1V8: C9.1 C12.2 C19.2 L2.1 R7.1 U3.2 U3.4 U5.5 | length 32.2
  Top Layer w0.203: U5.5@59.724,76.076 61.769,76.076 v1(61.761,76.084)
  Top Layer w0.381: L2.1@45.734,65.543 52.079,65.543 U3.4@52.084,65.547 ; R7.1@60.724,69.505 60.73,69.511 61.564,69.511 v1(61.57,69.516)
  Bottom Layer w0.381: 60.669,68.54 60.669,68.616 v1(61.57,69.516)
  Bottom Layer w0.508: v1(52.033,62.877) 59.653,62.877 60.669,63.893 60.669,68.54 ; 60.669,68.616 60.669,74.991 v1(61.761,76.084)
  other v1: 52.059,61.404 52.059,62.192
VDD3V3: C7.2 C8.2 C20.2 J3.4 JP1.1 L6.2 L7.1 L8.2 L9.2 R3.1 R9.1 R10.1 R11.1 R12.1 R13.1 R20.2 R21.2 R22.2 R23.2 R24.2 U3.3 U5.17 U5.21 | length 57.2
  Top Layer w0.203: v1(54.599,74.407) 54.624,74.407 54.793,74.576 U5.17@55.924,74.576 ; v1(57.574,71.643) U5.21@57.574,73.426
  Top Layer w0.254: R13.1@44.515,111.694 R9.1@51.448,111.694 ; R12.1@46.242,111.67 51.424,111.67 R9.1@51.448,111.694 ; R9.1@51.474,111.721 R9.1@51.448,111.694 ; R3.1@85.98,74.863 87.225,74.863 v1(87.25,74.839)
  Top Layer w0.381: L6.2@45.632,24.825 v1(45.632,31.049)
  Signal03 w0.762: JP1.1@12.826,35.215 24.423,35.215
  Bottom Layer w0.254: v1(48.274,105.624) J3.4@48.274,107.097 ; v1(87.25,74.839) 87.301,74.788 94.413,74.788 94.946,75.322 R24.2@94.946,77.735 R23.2@94.946,79.716 R22.2@94.946,81.722 R21.2@94.946,83.754 R20.2@94.946,85.736
  Bottom Layer w0.381: C20.2@53.303,74.406 v1(54.599,74.407) v1(54.599,74.407) ; v1(78.308,98.182) L7.1@78.308,99.783
  other v1: 58.053,42.911 58.917,42.937 58.053,43.775 58.917,43.8 58.053,44.638 58.917,44.664 58.917,45.502 58.078,45.527 55.894,58.534 55.894,59.321 47.106,111.669
ZY_RST: U4.B110 XS5.14 | length 25.9
  Top Layer w0.254: U4.B110@75.099,81.541 85.907,81.541 88.113,79.335 88.113,72.553 88.85,71.816 90.958,71.816 91.358,72.216 XS5.14@91.358,73.728
ZY_TCK: R22.1 U4.B112 XS5.6 | length 19.3
  Top Layer w0.254: U4.B112@75.099,82.341 86.453,82.341 88.037,80.757 v1(88.469,80.757)
  Bottom Layer w0.203: v1(88.469,80.757) 90.387,80.757 XS5.6@91.358,81.728
  Bottom Layer w0.254: XS5.6@91.358,81.728 93.29,81.728 R22.1@93.296,81.722
ZY_TDI: R24.1 U4.B116 XS5.10 | length 22.8
  Top Layer w0.203: U4.B116@75.099,83.941 79.099,83.941 87.165,83.941 88.367,82.738 89.841,82.738 90.374,82.205 90.374,78.712 XS5.10@91.358,77.728
  Bottom Layer w0.254: XS5.10@91.358,77.728 93.289,77.728 R24.1@93.296,77.735
ZY_TDO: R23.1 U4.B118 XS5.8 | length 26.2
  Top Layer w0.203: U4.B118@75.099,84.741 79.099,84.741 92.664,84.741 93.168,84.237 93.168,80.376 92.52,79.728 XS5.8@91.358,79.728
  Bottom Layer w0.203: R23.1@93.284,79.728 R23.1@93.296,79.716
  Bottom Layer w0.254: XS5.8@91.358,79.728 R23.1@93.284,79.728
ZY_TMS: R21.1 U4.B114 XS5.4 | length 18.8
  Top Layer w0.254: U4.B114@75.099,83.141 86.771,83.141 v1(87.148,82.764)
  Bottom Layer w0.203: v1@87.148,82.738 90.368,82.738 XS5.4@91.358,83.728
  Bottom Layer w0.254: XS5.4@91.358,83.728 93.27,83.728 R21.1@93.296,83.754
pads on no net: "H1. " "U4. " U1.2 U1.3 U1.5 U4.A26 U4.A41 U4.A43 U4.A47 U4.A49 U4.A59 U4.A61 U4.A71 U4.A73 U4.A81 U4.A83 U4.A86 U4.A87 U4.A88 U4.A89 U4.A97 U4.A99 U4.A117 U4.B3 U4.B5 U4.B9 U4.B10 U4.B11 U4.B12 U4.B15 U4.B16 U4.B17 U4.B18 U4.B22 U4.B24 U4.B28 U4.B30 U4.B34 U4.B36 U4.B40 U4.B42 U4.B46 U4.B52 U4.B54 U4.B60 U4.B64 U4.B66 U4.B69 U4.B70 U4.B71 U4.B72 U4.B76 U4.B78 U4.B80 U4.B81 U4.B82 U4.B86 U4.B88 U4.B90 U4.B92 U4.B93 U4.B95 U4.B97 U4.B101 U4.B115 U5.8 U5.10 U5.12 U5.13 U5.14 U5.15 U6.2 U6.3 U6.4 U6.5 U7.9 U7.10 U7.11 U7.12 U7.13 U7.14 U7.15 U8.3 U8.4 U9.5 USB1.MH1 USB1.MH2 USB_OTG.MH1 USB_OTG.MH2 XS5.12

## Polygon pours and split planes (outlines as drawn)
NetC1_2 on Top Layer "Top Layer-No Net" (solid, remove dead copper, pour order 7): 21.017,24.928 21.017,28.56 21.271,28.814 30.771,28.814 30.923,28.662 30.923,24.979 30.72,24.776 21.169,24.776
NetC10_1 on Top Layer "Top Layer-No Net" (solid, remove dead copper, pour order 8): 41.238,31.242 39.37,29.374 39.37,23.876 39.624,23.622 41.91,23.607 41.924,23.607 43.905,23.607 44.439,24.141 44.439,39.228 41.326,39.228 41.238,39.067
VCC5V on Top Layer "VCC5V_L01_P010" (solid, remove dead copper, pour order 10): 46.572,39.127 52.998,39.127 53.075,39.05 53.075,32.573 52.795,32.294 50.941,32.294 50.941,37.476 50.687,37.73 46.572,37.73
GND on Top Layer "Top Layer-No Net" (solid, remove dead copper, pour order 12): 51.144,46.289 56.986,46.289 57.113,46.162 57.113,43.521 56.961,43.368 51.144,43.368
VDD3V3 on Top Layer "VDD3V3_L01_P016" (solid, remove dead copper, pour order 16): 57.723,42.505 57.723,46.035 57.901,46.213 59.882,46.213 60.041,46.054 60.041,42.708 59.837,42.505
NetC4_1 on Top Layer "NETC4_1_L01_P018" (solid, remove dead copper, pour order 18): 55.843,37.145 55.843,40.168 55.996,40.32 59.501,40.32 61.787,40.32 61.965,40.498 61.965,45.934 61.888,46.01 61.152,46.01 61.05,45.908 61.05,45.197 61.05,41.463 60.872,41.286 55.259,41.286 54.954,40.981 54.954,37.171 55.081,37.044 55.742,37.044
VCC5V on Top Layer "VCC5V_L01_P030" (solid, remove dead copper, pour order 30): 23.788,41.54 48.249,41.54 48.249,38.085 24.197,38.085 23.788,38.368
VDD3V3 on Top Layer "VDD3V3_L01_P032" (solid, remove dead copper, pour order 32): 53.964,59.728 59.628,59.728 59.78,59.728 59.907,59.601 59.907,58.051 59.78,57.924 56.859,57.924 54.192,57.924 53.964,58.153
VDD1V8 on Top Layer "VDD1V8_L01_P036" (solid, remove dead copper, pour order 36): 52.516,59.169 52.516,63.436 52.516,65.722 51.678,65.722 51.652,65.697 51.652,64.274 51.652,59.169
GND on Top Layer "GND_L01_P040" (solid, remove dead copper, pour order 40): 49.735,58.686 49.735,60.337 46.61,60.337 46.509,60.236 46.509,58.813 46.636,58.686 48.896,58.686
GND on Top Layer "GND_L01_P042" (solid, remove dead copper, pour order 42): 23.941,44.08 34.863,44.08 35.015,43.927 35.015,42.403 34.914,42.302 32.983,42.302 24.093,42.302 23.941,42.454
NetJ1_1 on Top Layer "NONET_L02_P-001" (solid, pour order 43): 7.62,16.51 8.636,17.526 9.906,17.526 15.24,12.192 15.24,9.652 14.478,8.89 11.684,8.89 7.62,12.954
GND on Top Layer "GND_L01_P020" (solid, remove dead copper, pour order 20): 17.766,20.574 17.258,20.066 14.478,20.066 12.7,21.844 2.54,21.844 1.27,20.574 1.27,12.446 1.778,11.938 4.572,11.938 5.588,12.954 5.588,16.002 8.128,18.542 10.668,18.542 13.466,15.744 18.288,15.784 23.201,15.784 23.201,20 23.201,23.023 20.534,23.023 20.204,23.353 20.204,28.763 19.976,28.992 17.918,28.992 17.766,28.84
VCC12V on Top Layer "Top Layer-No Net" (solid, pour order 3): 24.892,24.369 24.907,24.369 25.654,23.622 25.654,11.938 22.606,8.89 19.05,8.89 18.034,9.906 18.034,13.208 19.05,14.224 22.947,14.224 23.963,15.24 23.963,21.626 23.963,23.379 23.735,23.607 21.042,23.607 21.042,24.369
VDD3V3 on Signal03 "VDD3V3_L03_P044" (solid, remove dead copper, pour order 44): 17.78,118.872 84.836,118.872 99.822,103.886 99.822,58.928 96.774,55.88 89.916,55.84 64.784,55.84 62.727,53.782 62.727,33.31 60.009,30.592 18.176,30.592 14.732,34.036 14.732,115.824
GND on GND (split plane): 97.676,119.484 97.873,119.455 98.066,119.406 98.254,119.339 98.434,119.254 98.605,119.151 98.766,119.032 98.913,118.898 99.047,118.751 99.166,118.591 99.268,118.419 99.354,118.239 99.421,118.051 99.469,117.858 99.499,117.661 99.508,117.478 99.506,117.462 99.506,2.54 99.508,2.524 99.499,2.341 99.469,2.144 99.421,1.95 99.354,1.762 99.268,1.582 99.166,1.411 99.047,1.251 98.913,1.103 98.766,0.969 98.605,0.851 98.434,0.748 98.254,0.663 98.066,0.596 97.873,0.547 97.676,0.518 97.493,0.509 97.477,0.51 97.476,0.51 91.962,0.51 2.544,0.51 2.528,0.508 2.345,0.517 2.148,0.547 1.954,0.595 1.767,0.662 1.586,0.747 1.415,0.85 1.255,0.969 1.107,1.103 0.973,1.25 0.855,1.411 0.752,1.582 0.667,1.762 0.6,1.95 0.551,2.143 0.522,2.34 0.513,2.523 0.515,2.539 0.515,117.462 0.513,117.478 0.522,117.661 0.551,117.858 0.6,118.051 0.667,118.239 0.752,118.419 0.855,118.591 0.973,118.751 1.107,118.898 1.255,119.032 1.415,119.151 1.586,119.254 1.767,119.339 1.954,119.406 2.148,119.455 2.345,119.484 2.528,119.493 2.544,119.491 97.476,119.491 97.477,119.491 97.493,119.493

## Keep-outs
Keep-Out Layer:
  the board outline again, w0.2

## Silkscreen, mask and mechanical layers (free items; w line width, h text height)
Top Overlay:
  text "CAN_N" at 40.222,115.758 h0.8
  text "CAN_P" at 27.522,89.622 h0.8
  text "GND" at 19.42,32.116 h0.8
  text "GND" at 93.397,22.163 h0.8
  text "GND" at 34.018,6.349 h0.8
  text "VCC5V" at 49.646,2.097 h0.8
Bottom Overlay:
  lines w0.203: 95.759,70.75 95.759,75.855 96.165,75.449
  text "485_P" at 40.539,8.419 h0.8 r90
  text "485_N" at 42.901,8.343 h0.8 r90
Mechanical 1:
  text "四层板  制作软件AD16.1.12" at -4.736,151.496 h15.24
  text "过孔盖油  绿油 白字" at 54.7,129.271 h15.24
  text "板材FR4" at -6.615,128.789 h15.24

## Text inside footprints (layer, text, board x,y; h text height)
H1: Mechanical 6 "1" at 76.874,15.557 h0.76; Mechanical 6 "15" at 74.844,9.397 h0.76; Mechanical 6 "16" at 90.334,9.397 h0.76; Mechanical 6 "2" at 78.144,13.017 h0.76; Mechanical 6 "3" at 79.414,15.557 h0.76; Mechanical 6 "4" at 80.684,13.017 h0.76; Mechanical 6 "7" at 84.494,15.557 h0.76; Mechanical 6 "5" at 81.954,15.557 h0.76; Mechanical 6 "6" at 83.224,13.017 h0.76; Mechanical 6 "8" at 85.764,13.017 h0.76; Mechanical 6 "9" at 87.034,15.557 h0.76
XS6: Top Overlay "1" at 27.739,106.267 h0.25; Top Overlay "2" at 21.16,106.14 h0.25; Top Overlay "9" at 28.018,116.467 h0.25; Top Overlay "10" at 20.939,116.467 h0.25